# Altium PCB LED.PcbDoc
Units mm, origin at the board's own origin, x right, y up, seen from the top; angles counter-clockwise.
Board outline 17.82 x 15.83 mm, 2 copper layers (Top Layer, Bottom Layer), stack 1.671 mm thick; 5 components, 4 nets, 10 pads, 1 vias.
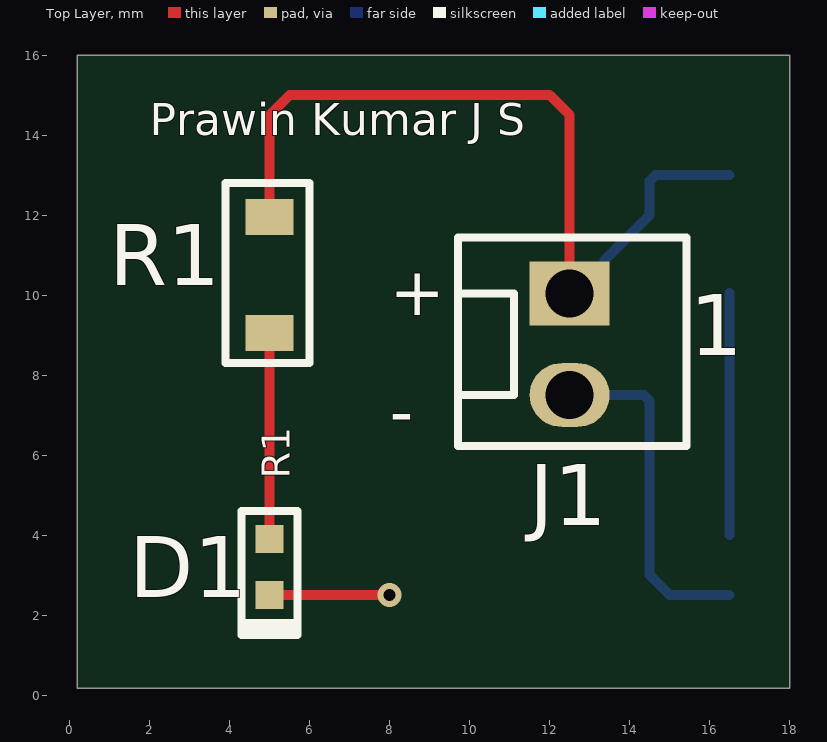
[diagram p0: Top Layer view]
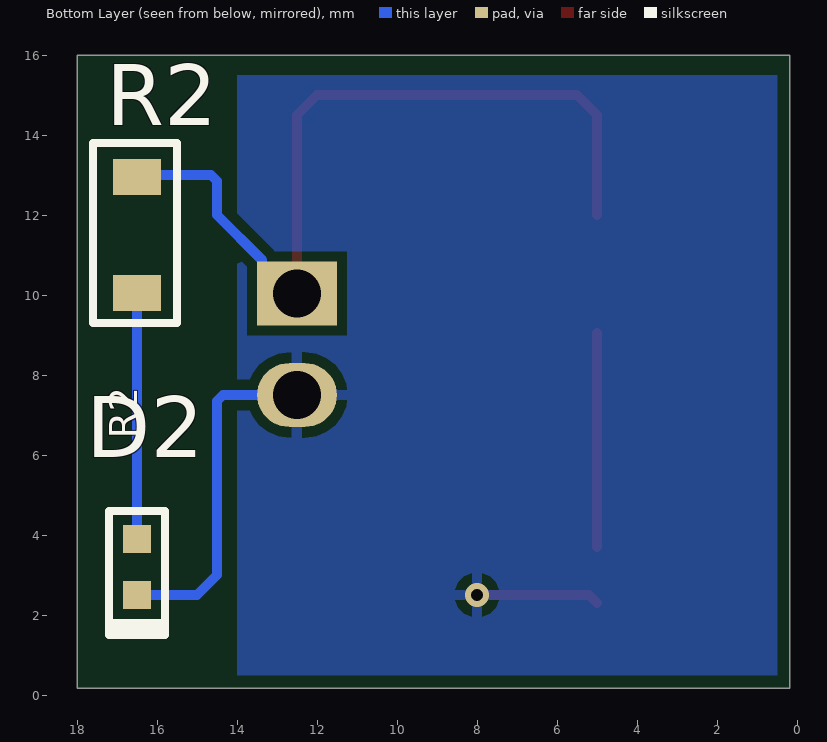
[diagram p1: Bottom Layer view, seen from below]
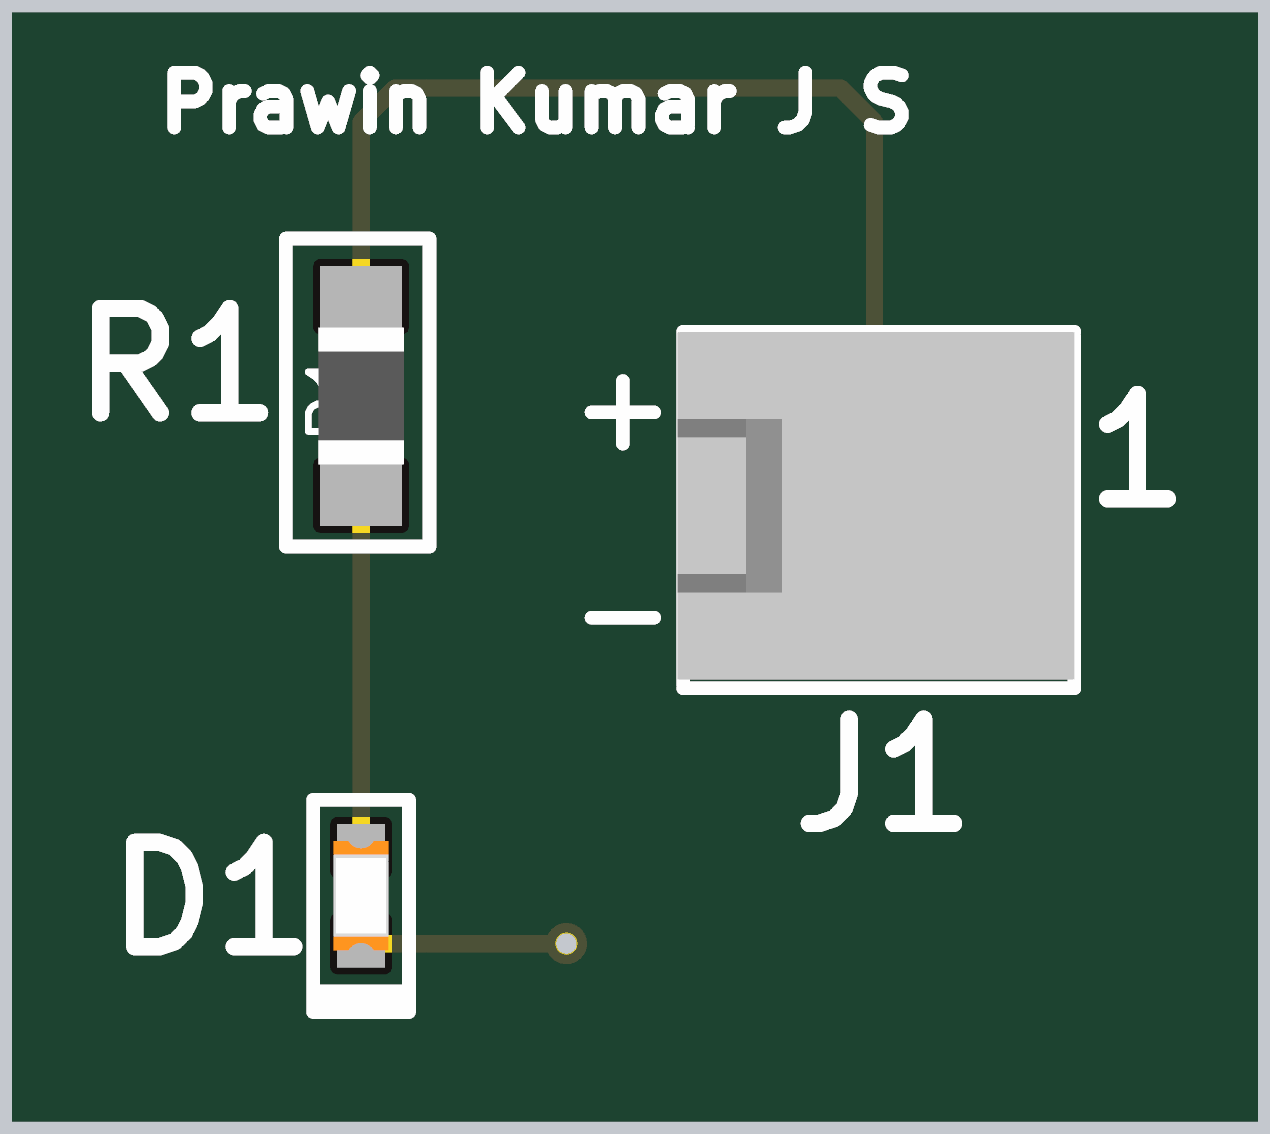
[diagram p2: 3D render of the assembled board from above, using the file's embedded part models]

## Layer stack, top to bottom
Top Solder: solder mask 0.0102, Solder Resist, Dk 3.5
Top Layer: signal copper 0.0356
Dielectric 1: dielectric 1.6, FR-4, Dk 4.8
Bottom Layer: signal copper 0.0356
Bottom Solder: solder mask 0.0102, Solder Resist, Dk 3.5

## Board outline
0.184,0.172 18,0.172 18,16 0.184,16

## Design rules (kind name [scope] priority, off if disabled: settings)
Clearance [All] p1: gap=0.254 ignorepadtopadclearanceinfootprint=FALSE
PolygonConnect [All] p1: connectstyle=Relief reliefconductorwidth=0.254 reliefentries=4 polygonreliefangle="90 Angle" airgapwidth=0.254
RoutingVias [All] p1: holewidth=0.711 width=1.27 viastyle="Through Hole" minholewidth=0.711 minwidth=1.27 maxholewidth=0.711 maxwidth=1.27
SolderMaskExpansion [All] p1: expansion=0.102 istentingtop=FALSE
Width [All] p1: maxlimit=0.254 minlimit=0.254 preferedwidth=0.254
30 further rules are at their usual default settings.

## Components (designator, comment, footprint, x,y, rotation, side; value= is the part's Value field where it differs from the comment)
D1 "Green" "LED0603G - DUPLICATE" 5,3.2 r90 top
D2 "Green" "LED0603G - DUPLICATE" 16.5,3.2 r90 bottom
J1 "1x2 Header" HDR1x2 12.5,10.04 r0 top
R1 "360R" R0805 5,10.5 r90 top
R2 "360R" R0805 16.5,11.5 r90 bottom

## Footprints (in the part's own frame and the unit in brackets; to place one, negate y for a bottom-side part, rotate by r counter-clockwise, add the part's x,y. Pads: shape width x height; smd on the part's side, far side on the other; paste and mask are expansions set on the pad)
HDR1x2 [mm]
  rect 2x1.6 hole 1.2: 1(0,0)
  oval 2x1.6 hole 1.2: 2(0,-2.54)
  silkscreen extent -2.79,-3.81 2.92,1.4, body extent -2.88,-3.68 2.92,1.4, height 11.71
"LED0603G - DUPLICATE" [mm]
  rect 0.7x0.7 smd: 1(-0.7,0) 2(0.7,0)
  silkscreen extent -1.7,-0.7 1.4,0.7, body extent -0.8,-0.4 0.8,0.4, height 0.59
R0805 [mm]
  rect 0.9x1.2 smd: 1(-1.45,0) 2(1.45,0)
  silkscreen extent -2.2,-1 2.3,1.1, body extent -1,-0.63 1,0.63, height 0.61

## Part data
D1 D2: library part LSM0603453V, "LED GREEN CLEAR CHIP 0603 SMD", Manufacturer="Visual Communications", Supplier Part Number=LSM0603453VCT-ND, Category=LEDs, ComponentLink1Description=https://datasheet.ciiva.com:443/pdfs/VipMasterIC/IC/VISU/VISU-S-A0009188582/VISU-S-A0009188582-1.pdf?src-supplier=IHS+Markit, ComponentLink1URL=https://datasheet.ciiva.com:443/pdfs/VipMasterIC/IC/VISU/VISU-S-A0009188582/VISU-S-A0009188582-1.pdf?src-supplier=IHS+Markit, ComponentLink2Description=http://www.farnell.com/datasheets/2699708.pdf?src-supplier=Farnell, ComponentLink2URL=http://www.farnell.com/datasheets/2699708.pdf?src-supplier=Farnell, ComponentLink3Description=https://vcclite.com/wp-content/uploads/wpallimport/files/files/LSM0603453V.pdf?src-supplier=Digikey, ComponentLink3URL=https://vcclite.com/wp-content/uploads/wpallimport/files/files/LSM0603453V.pdf?src-supplier=Digikey, ComponentLink4Description=http://www.farnell.com/datasheets/2699708.pdf?src-supplier=Newark, ComponentLink4URL=http://www.farnell.com/datasheets/2699708.pdf?src-supplier=Newark, Manufacturer Part Number=LSM0603453V, Optoelectronic Device Type="SINGLE COLOR LED", Pricing="1=0.46, 10=0.283, 100=0.1626, 1000=0.12726, 2000=0.11666 (USD)", Reach SVHC Compliant=Yes, RoHS=Yes, RoHS Compliant=Yes, Stock=92418, Supplier=Digikey
J1: library part 22-27-2021, "CONN HEADER VERT 2POS 2.54MM", Contact Resistance=10mR, Flammability Rating="UL94 V-0", Insulation Color=White, Insulation Resistance=1GR, Manufacturer=Molex, Max Operating Temperature=75°C, Min Operating Temperature=0°C, Rated Current (Signal)=4A, Supplier Part Number=WM4111-ND, Body Breadth=0.23inch, Body Depth=0.46inch, Body Length=0.2inch, Body/Shell Style=RECEPTACLE, Category="Headers and Wire Housings", ComponentLink1Description=https://datasheet.ciiva.com:443/pdfs/VipMasterIC/IC/MOLE/MOLE-E-A0003552261/MOLE-S-A0003534498-1.pdf?src-supplier=IHS+Markit, ComponentLink1URL=https://datasheet.ciiva.com:443/pdfs/VipMasterIC/IC/MOLE/MOLE-E-A0003552261/MOLE-S-A0003534498-1.pdf?src-supplier=IHS+Markit, Connector Type="BOARD CONNECTOR", Contact Finish - Mating="NOT SPECIFIED", Contact Finish - Termination="Bright Tin (Sn)", Contact Gender=Male, Contact Material=Brass, Contact Pattern=RECTANGULAR, Contact Style="SQ PIN-SKT", DIN Conformance=No, Durability=25Cycles, Filter Feature=No, IEC Conformance=No, Insulation Material=Nylon, JESD-609 Code=e3, Manufacturer Part Number=22-27-2021, Mating Contact Pitch=0.1inch, Mating Information="MULTIPLE MATING PARTS AVAILABLE", MIL Conformance=No, Mixed Contacts=No, Mounting Option 1=LOCKING, Mounting Style=STRAIGHT, Mounting Technology=Board, Number Of Connectors=1, Number of Contacts=2, Number Of PCB Rows=1, Number of Rows Loaded=1, Option="General Purpose", PCB Contact Pattern=RECTANGULAR, Plating Thickness=100uin, Polarization Key="POLARIZED HOUSING", Pricing="1=0.3, 10=0.245, 100=0.18, 1000=0.14317, 5000=0.12272, 10000=0.11453 (USD)", Reach SVHC Compliant=Yes, Reference Standard=UL, Reliability=COMMERCIAL, RoHS=Yes, RoHS Compliant=Yes, Stock=73435, Supplier=Digikey, Terminal Length=0.14inch, Terminal Pitch=2.54mm, Termination=Solder
R1 R2: library part RT0805BRD07360RL, "RES SMD 360 OHM 0.1% 1/8W 0805", Case/Package=0805, Manufacturer=Yageo, Max Operating Temperature=155°C, Min Operating Temperature=-55°C, Package Height=0.5mm, Package Length=2mm, Package Style=SMTMeter, Package Width=1.25mm, Power=125mW, Rated Temperature=70°C, Resistor Type="FIXED RESISTOR", Supplier Part Number=YAG1877CT-ND, Temperature Coefficient=25ppm/°C, Tolerance=0.1%, Working Voltage=150V, Additional Feature="HIGH PRECISION", Category="Chip SMD Resistors", ComponentLink1Description=https://datasheet.ciiva.com:443/pdfs/VipMasterIC/IC/YAGO/YAGO-S-A0008510989/YAGO-S-A0008510989-1.pdf?src-supplier=IHS+Markit, ComponentLink1URL=https://datasheet.ciiva.com:443/pdfs/VipMasterIC/IC/YAGO/YAGO-S-A0008510989/YAGO-S-A0008510989-1.pdf?src-supplier=IHS+Markit, ComponentLink2Description=https://datasheet.ciiva.com/12810/pyu-rt-1-to-0-05-rohs-l-4-12810054.pdf?src-supplier=Mouser, ComponentLink2URL=https://datasheet.ciiva.com/12810/pyu-rt-1-to-0-05-rohs-l-4-12810054.pdf?src-supplier=Mouser, Construction=Chip, Manufacturer Part Number=RT0805BRD07360RL, Mounting Technology="Surface Mount", Packaging="Tape and Reel", Pins=2, Pricing="1=0.16, 10=0.12, 50=0.0946, 100=0.0846, 500=0.06418, 1000=0.05663 (USD)", Reach SVHC Compliant=Yes, RoHS=Yes, RoHS Compliant=Yes, Stock=3518, Supplier=Digikey, Technology="THIN FILM", Termination=Wraparound

## Via types
v1: diameter 0.6, hole 0.3, Top Layer to Bottom Layer, tented both sides, 1 vias

## Nets (pads, with @x,y where several pads share a name; then routed paths per layer and width w, separated by ;. In a path a pad name is that pad's centre, name@x,y a point inside that pad or via, vN(x,y) a via of type N, cw(c..) or ccw(c..) an arc to the next point about the centre after c; other vN are vias at no path point)
+3v3: J1.1 R1.2 R2.2 | length 20.7
  Top Layer w0.254: R1.2@5,12 5,14.5 5.5,15 12,15 12.5,14.5 J1.1
  Bottom Layer w0.254: J1.1 12.5,10 12.66,10 13.373,10.713 13.373,10.873 14.5,12 14.5,12.851 14.649,13 R2.2@16.5,13
"Diode 1": D1.2 R1.1 | length 5.5
  Top Layer w0.254: D1.2 5,3.7 R1.1
"Diode 2": D2.2 R2.1 | length 6.1
  Bottom Layer w0.254: D2.2@16.5,4 R2.1
GND: D1.1 D2.1 J1.2 | length 11.7
  Top Layer w0.254: D1.1@5,2.3 5.2,2.5 v1(8,2.5)
  Bottom Layer w0.254: J1.2 14.351,7.5 14.5,7.351 14.5,3 15,2.5 D2.1

## Polygon pours and split planes (outlines as drawn)
GND on Bottom Layer "GND_L02_P000" (solid, pour order 0): 0.5,0.5 14,0.5 14,15.5 0.5,15.5

## Silkscreen, mask and mechanical layers (free items; w line width, h text height)
Top Overlay:
  text "Prawin Kumar J S" at 2,14 h0.8
  text "+" at 8,9.5 h1.2
  text "-" at 8,6.5 h1.2
Board:
  lines w0.2: 0,0 0,16 18,16 18,0 17.827,0.173 0.233,0.173

## Text inside footprints (layer, text, board x,y; h text height)
J1: Top Overlay "1" at 15.5,8.5 h1.52